# Altium PCB RRTC_PCB_V1-2.PcbDoc
Units mil, origin at the board's own origin, x right, y up, seen from the top; angles counter-clockwise.
Board outline 6300 x 7800 mil, 4 copper layers (Top Layer, Int1, Int2, Bottom Layer), stack 53.912 mil thick; 67 components, 92 nets, 426 pads, 0 vias.
Unrouted connection lines stored in the file: 133.
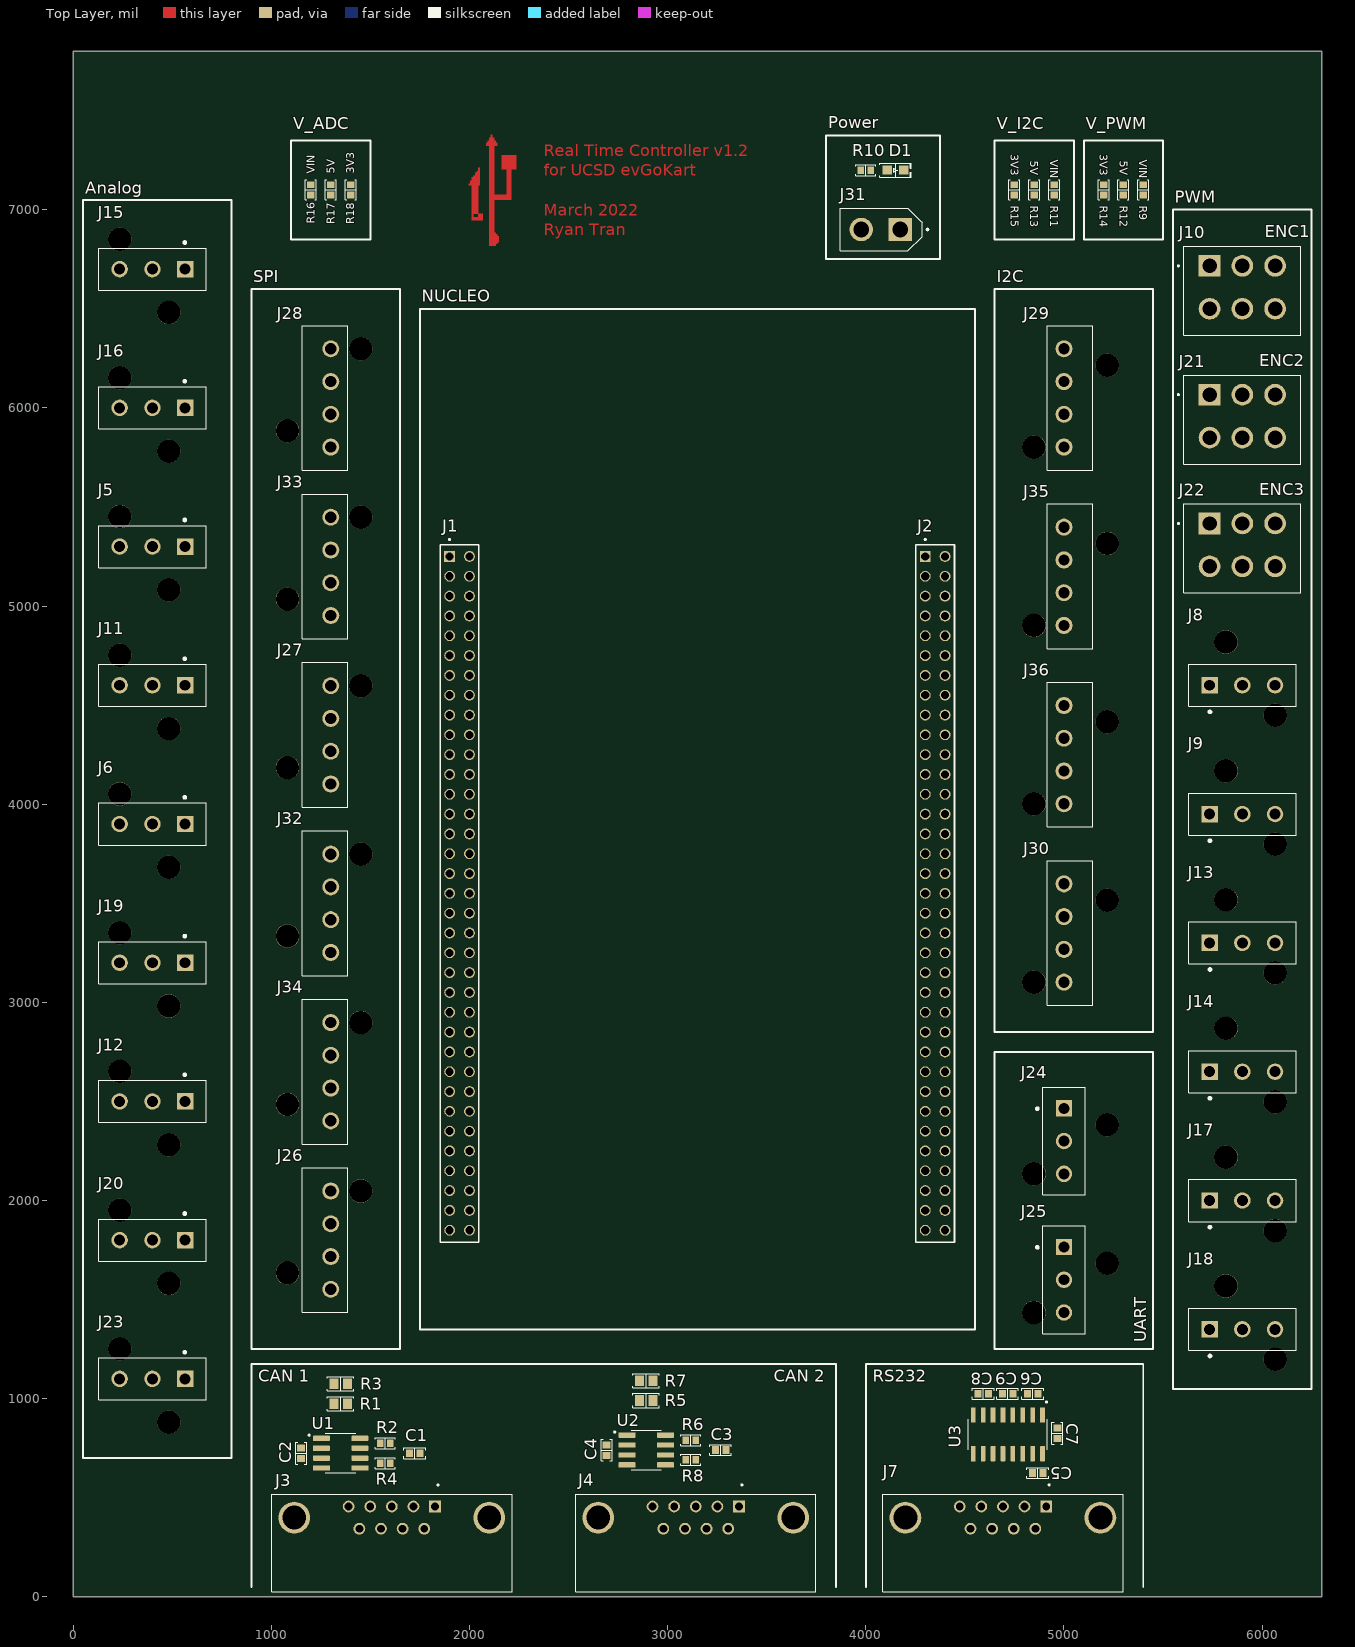
[diagram p0: Top Layer view]
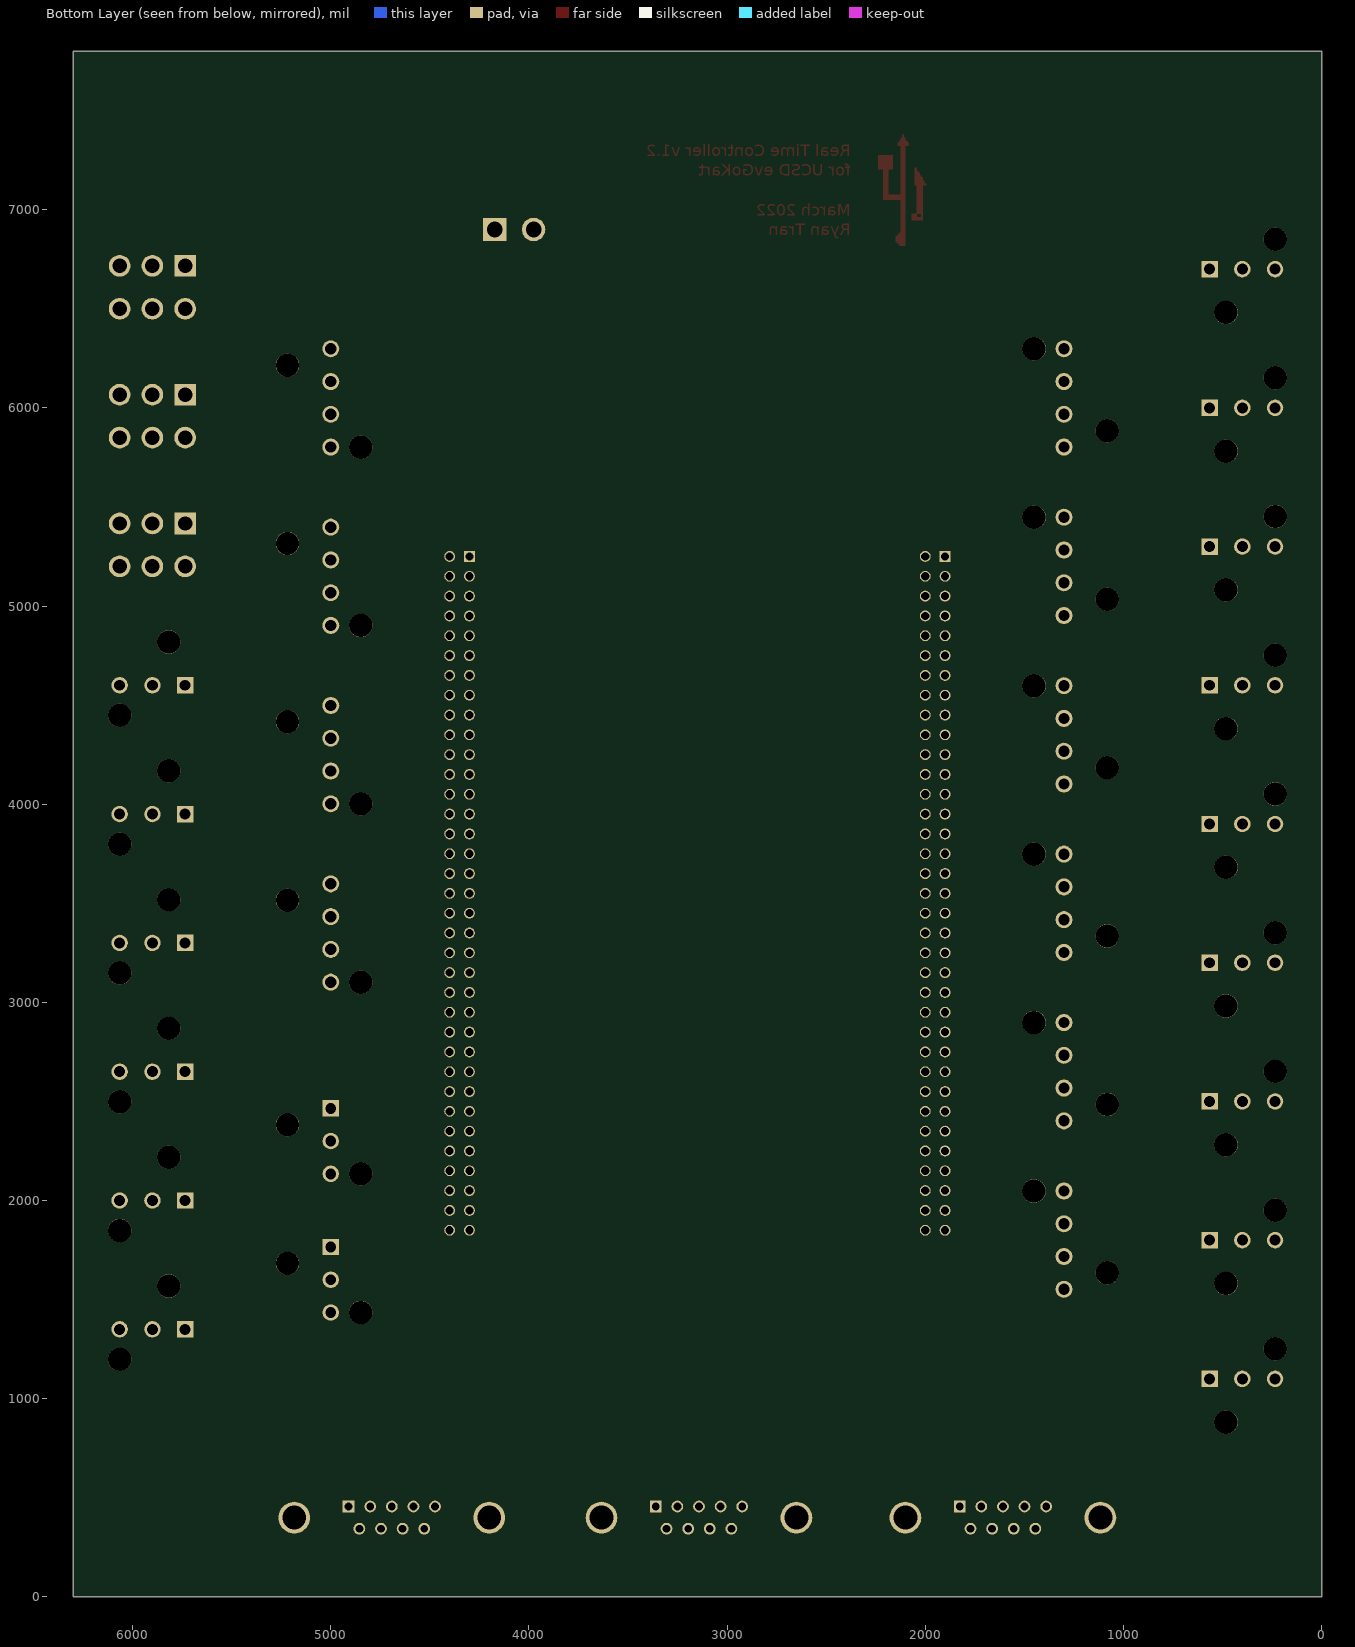
[diagram p1: Bottom Layer view, seen from below]
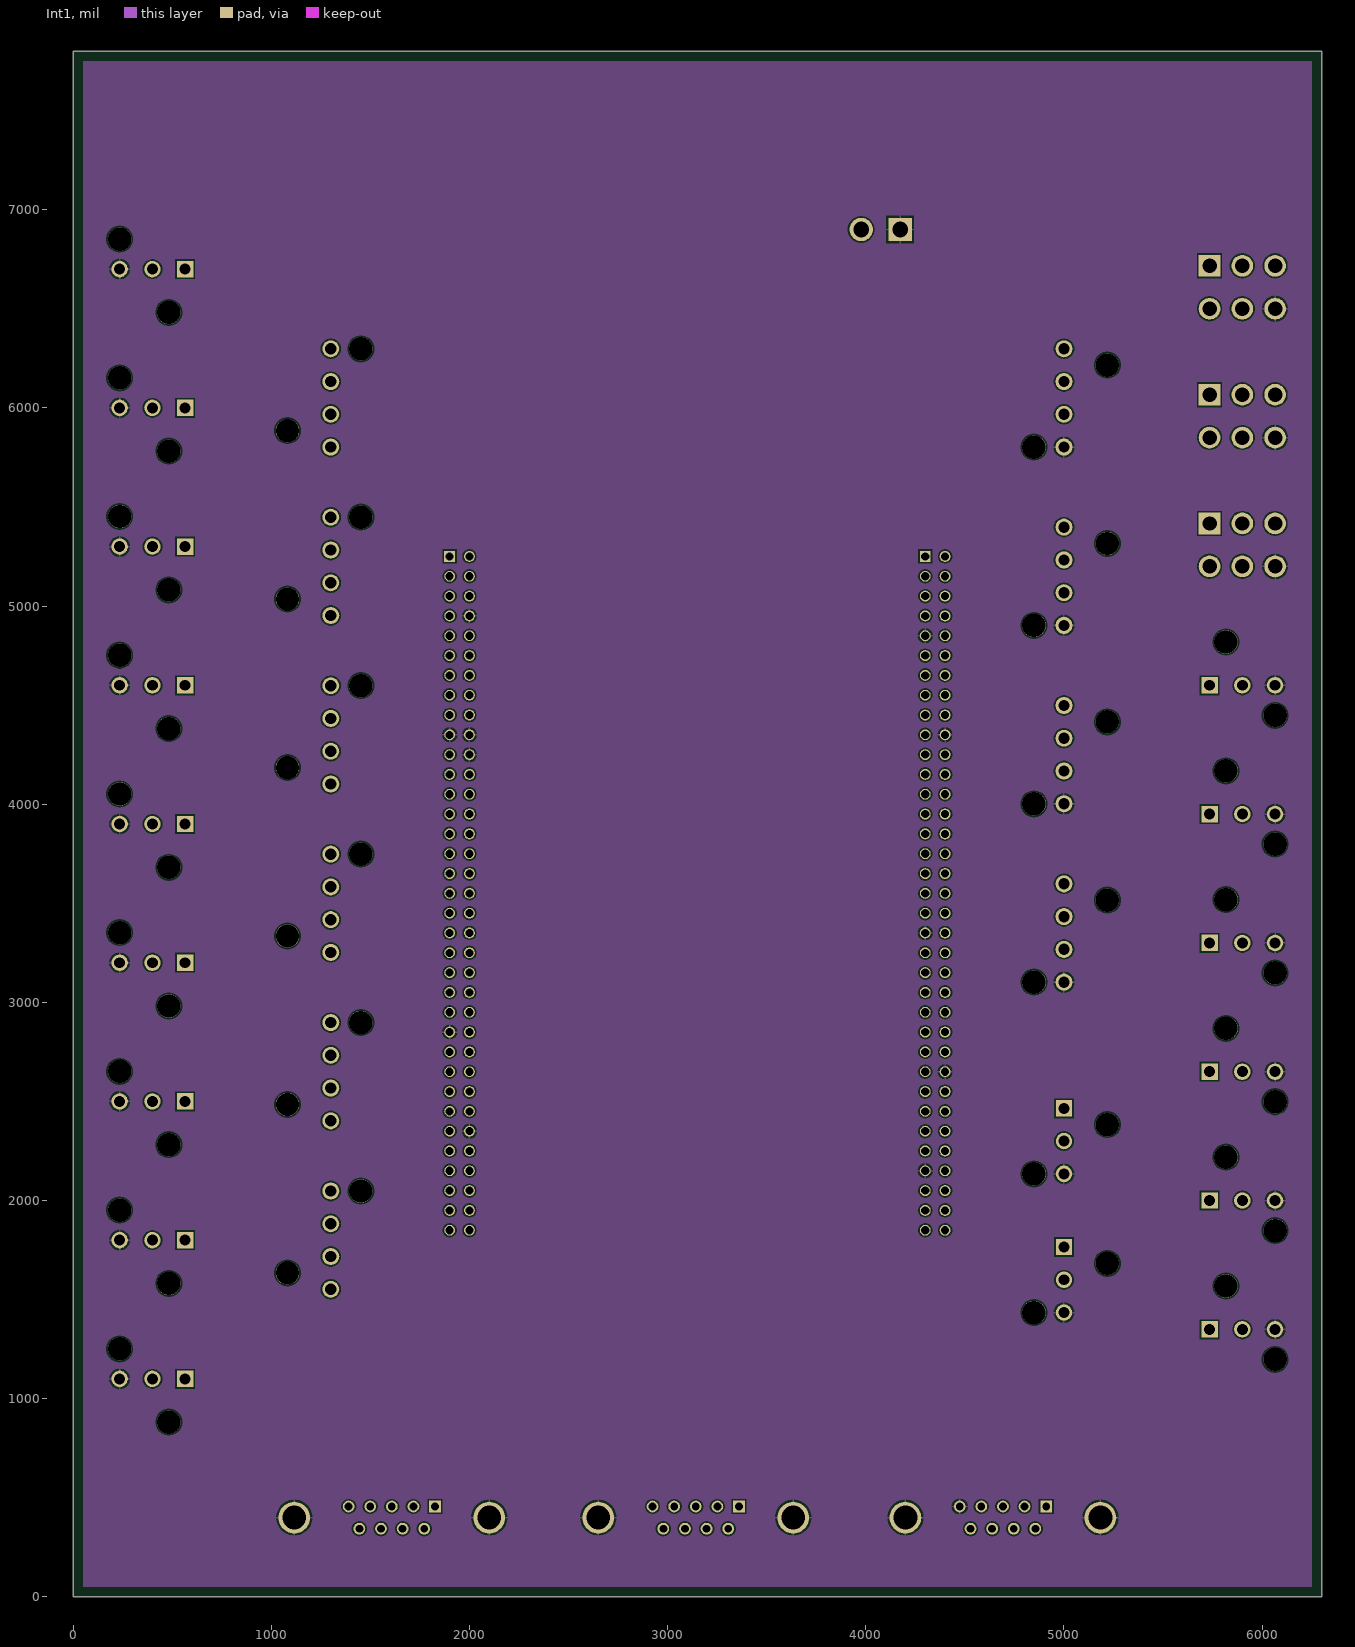
[diagram p2: Int1]
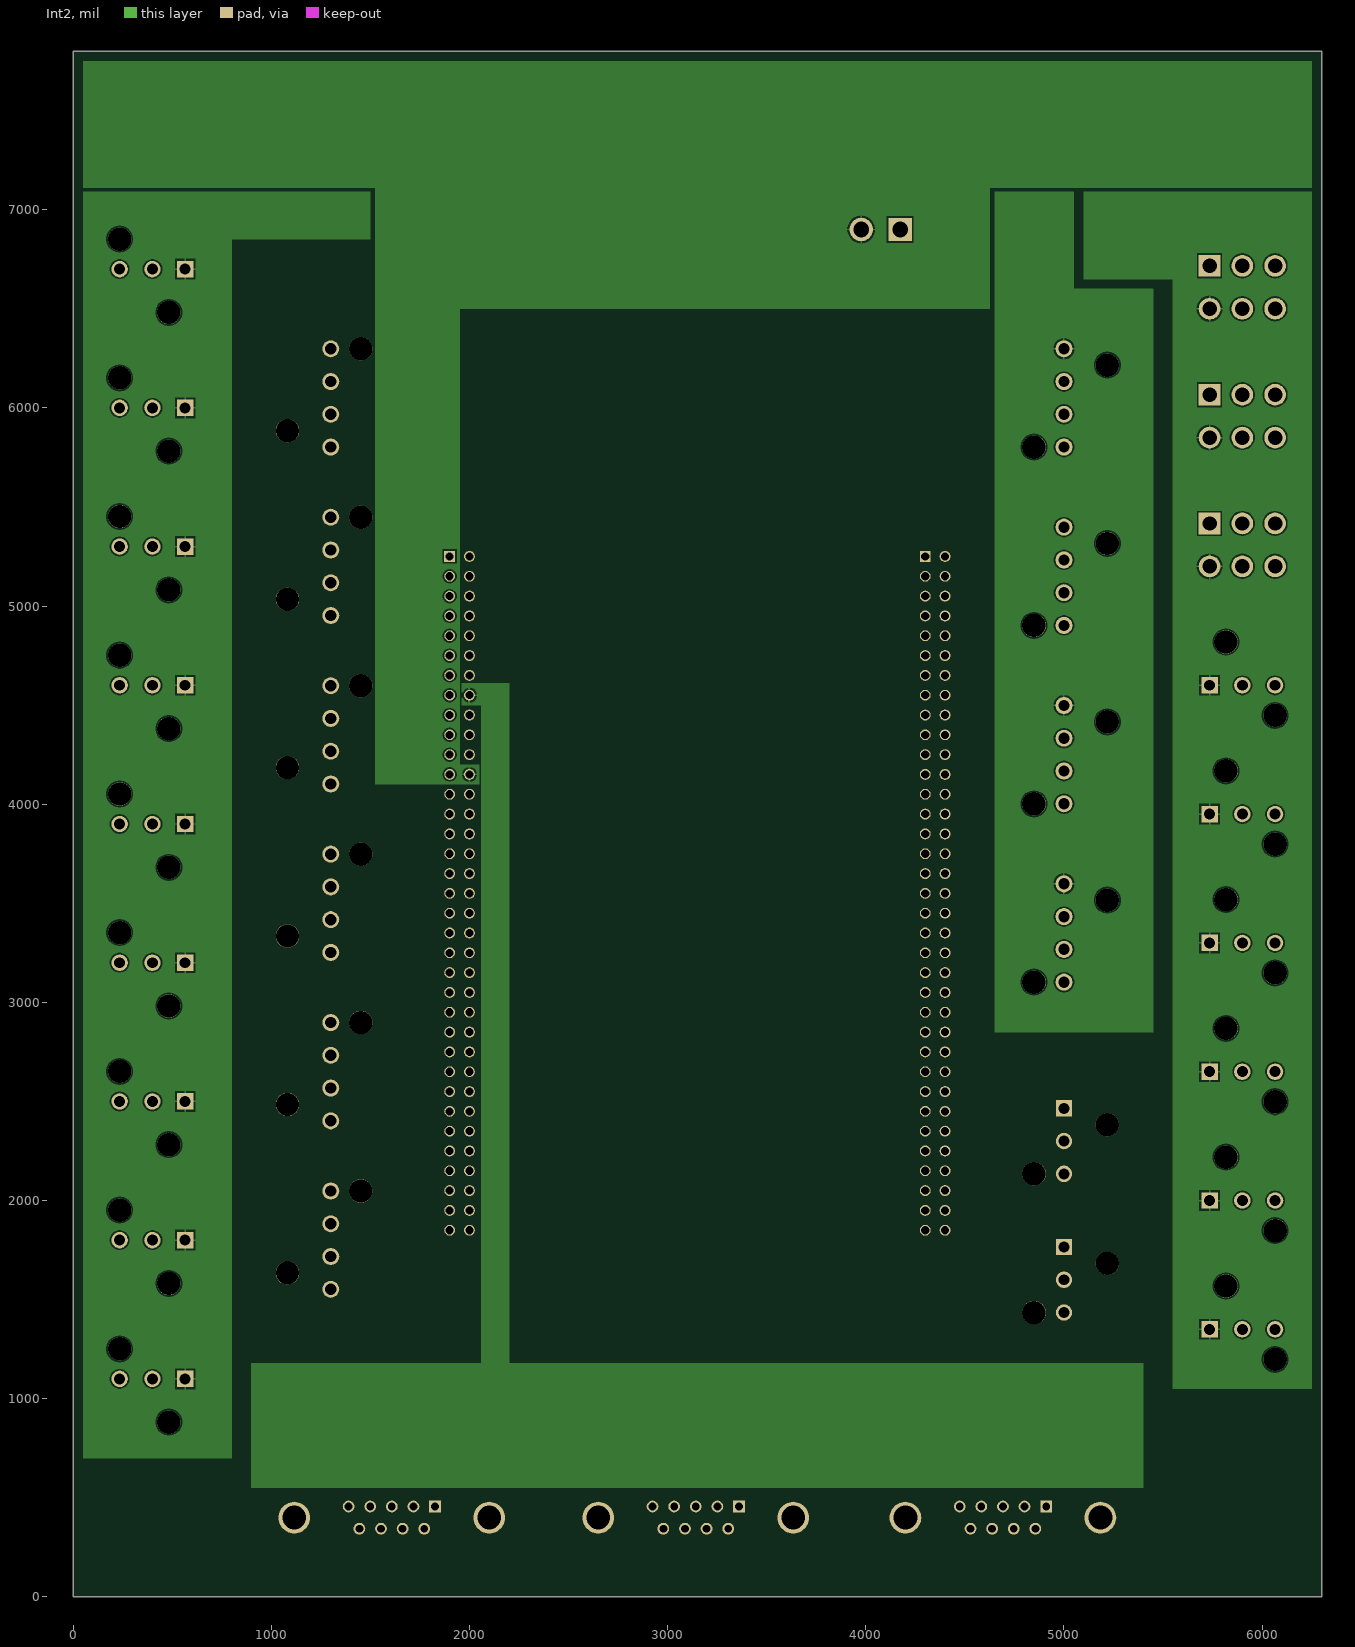
[diagram p3: Int2]

## Layer stack, top to bottom
Top Solder: solder mask 1, SM-001, Dk 4
Top Layer: signal copper 1.378
Dielectric 1: prepreg 5.1, PP-017, Dk 4.3
Dielectric 2: prepreg 5.1, PP-017, Dk 4.3
Int1: signal copper 1.378
Dielectric 3: core 28, Core-039, Dk 4.8
Int2: signal copper 1.378
Dielectric 4: prepreg 5.1, PP-017, Dk 4.3
Dielectric 5: prepreg 5.1, PP-017, Dk 4.3
Bottom Layer: signal copper 1.378
Bottom Solder: solder mask 1, SM-001, Dk 4

## Board outline
0,0 0,7800 6300,7800 6300,0

## Design rules (kind name [scope] priority, off if disabled: settings)
Clearance [All] p1: gap=7.87 ignorepadtopadclearanceinfootprint=FALSE except(5: Arc-Arc Arc-Track Track-Track SMDPad-SMDPad; 5.91: Arc-Text Track-Text SMDPad-Text THPad-Text Via-Text Fill-Text Poly-Text Region-Text Text-Text; 10: Arc-Via Arc-Hole Track-Via Track-Hole Via-Via; 12.99: Arc-THPad Track-THPad; 19.68: THPad-THPad)
DiffPairsRouting DiffPair_DIFF120DiffPairsRouting [InDifferentialPairClass('DIFF120')] p1: maxlimit=5 minlimit=5 mostfreqgap=5 toplayer_minwidth=5 toplayer_maxwidth=5 toplayer_prefwidth=5 midlayer1_minwidth=5 midlayer1_maxwidth=5 midlayer1_prefwidth=5 midlayer2_minwidth=5 midlayer2_maxwidth=5 midlayer2_prefwidth=5 bottomlayer_minwidth=5 bottomlayer_maxwidth=5 bottomlayer_prefwidth=5 maxuncoupledlength=500
DiffPairsRouting [All] p2: maxlimit=10 minlimit=5 mostfreqgap=10 toplayer_minwidth=5 toplayer_maxwidth=15 toplayer_prefwidth=15 midlayer1_minwidth=5 midlayer1_maxwidth=15 midlayer1_prefwidth=15 midlayer2_minwidth=5 midlayer2_maxwidth=15 midlayer2_prefwidth=15 bottomlayer_minwidth=5 bottomlayer_maxwidth=15 bottomlayer_prefwidth=15 maxuncoupledlength=500
HoleToHoleClearance [All] p1: gap=19.68 allowstackedmicrovias=TRUE
MatchedLengths DiffPair_DIFF120MatchedLengths [InDifferentialPairClass('DIFF120')] p1: tolerance=1000 checknetsindiffpair=FALSE checkdiffpairvsdiffpair=TRUE checkxsignals=TRUE checkothers=TRUE
PolygonConnect [All] p1: connectstyle=Relief reliefconductorwidth=10 reliefentries=4 polygonreliefangle="90 Angle" airgapwidth=10
RoutingVias [All] p1: holewidth=11.81 width=23.62 viastyle="Through Hole" minholewidth=11.81 minwidth=23.62 maxholewidth=248.03 maxwidth=248.03
SilkToSolderMaskClearance [IsPad] p1: minsilkscreentomaskgap=5.91 clearancetoexposedcopper=TRUE
SolderMaskExpansion [All] p1: expansion=4 istentingtop=FALSE
Width [All] p1: maxlimit=20 minlimit=5 preferedwidth=10
27 further rules are at their usual default settings.

## Classes and differential pairs
differential pair CAN2: +CAN2_P -CAN2_N
differential pair CAN1: +CAN1_P -CAN1_N

## Components (designator, comment, footprint, x,y, rotation, side; value= is the part's Value field where it differs from the comment)
C1 "4700pF" "CAP 0603_1608" 1723.43,725 r0 top
C2 "0.1µF" "CAP 0603_1608" 1150,725 r270 top
C3 "4700pF" "CAP 0603_1608" 3266.93,740.91 r0 top
C4 "0.1µF" "CAP 0603_1608" 2691.93,740.91 r270 top
C5 "0.1µF" "CAP 0603_1608" 4866.93,625 r0 top
C6 "0.1µF" "CAP 0603_1608" 4841.93,1025 r0 top
C7 "0.1µF" "CAP 0603_1608" 4966.93,825 r90 top
C8 "0.1µF" "CAP 0603_1608" 4591.93,1025 r0 top
C9 "0.1µF" "CAP 0603_1608" 4715.36,1025 r0 top
D1 "Green" "LED 0805_2012 GREEN" 4150,7200 r0 top
J1 "SSW-135-01-T-D" SAMTEC_SSW-135-01-T-D 1900,5250 r90 top locked
J2 "SSW-135-01-T-D" SAMTEC_SSW-135-01-T-D 4300,5250 r90 top locked
J3 "A-DF_09_A/KG-T2S" ASSMANN_A-DF09A/KG-T2S 1608.07,400 r0 top
J4 "A-DF_09_A/KG-T2S" ASSMANN_A-DF09A/KG-T2S 3141.93,400 r0 top
J5 "39-30-1039" MOLEX_39-30-1039 400,5300 r0 top
J6 "39-30-1039" MOLEX_39-30-1039 400,3900 r0 top
J7 "A-DF_09_A/KG-T2S" ASSMANN_A-DF09A/KG-T2S 4691.93,400 r0 top
J8 "39-30-1039" MOLEX_39-30-1039 5900,4600 r180 top
J9 "39-30-1039" MOLEX_39-30-1039 5900,3950 r180 top
J10 "0039281063" MOLEX_0039281063 5734.65,6716.54 r180 top
J11 "39-30-1039" MOLEX_39-30-1039 400,4600 r0 top
J12 "39-30-1039" MOLEX_39-30-1039 400,2500 r0 top
J13 "39-30-1039" MOLEX_39-30-1039 5900,3300 r180 top
J14 "39-30-1039" MOLEX_39-30-1039 5900,2650 r180 top
J15 "39-30-1039" MOLEX_39-30-1039 400,6700 r0 top
J16 "39-30-1039" MOLEX_39-30-1039 400,6000 r0 top
J17 "39-30-1039" MOLEX_39-30-1039 5900,2000 r180 top
J18 "39-30-1039" MOLEX_39-30-1039 5900,1350 r180 top
J19 "39-30-1039" MOLEX_39-30-1039 400,3200 r0 top
J20 "39-30-1039" MOLEX_39-30-1039 400,1800 r0 top
J21 "0039281063" MOLEX_0039281063 5734.65,6066.54 r180 top
J22 "0039281063" MOLEX_0039281063 5734.65,5416.54 r180 top
J23 "39-30-1039" MOLEX_39-30-1039 400,1100 r0 top
J24 "39-30-1039" MOLEX_39-30-1039 5000,2300 r90 top
J25 "39-30-1039" MOLEX_39-30-1039 5000,1600 r90 top
J26 "0039301049" MOLEX_0039301049 1300,1800 r270 top
J27 "0039301049" MOLEX_0039301049 1300,4350 r270 top
J28 "0039301049" MOLEX_0039301049 1300,6050 r270 top
J29 "0039301049" MOLEX_0039301049 5000,6050 r90 top
J30 "0039301049" MOLEX_0039301049 5000,3350 r90 top
J31 "XT30UPB-M" AMASS_XT30-M 4075,6900 r180 top
J32 "0039301049" MOLEX_0039301049 1300,3500 r270 top
J33 "0039301049" MOLEX_0039301049 1300,5200 r270 top
J34 "0039301049" MOLEX_0039301049 1300,2650 r270 top
J35 "0039301049" MOLEX_0039301049 5000,5150 r90 top
J36 "0039301049" MOLEX_0039301049 5000,4250 r90 top
R1 "1 kOhms" "RES 0805_2012" 1350,975 r180 top
R2 "60.4 Ohms" "RES 0603_1608" 1575,775 r0 top
R3 "1 kOhms" "RES 0805_2012" 1350,1075 r0 top
R4 "60.4 Ohms" "RES 0603_1608" 1575,675 r180 top
R5 "1 kOhms" "RES 0805_2012" 2891.93,990.91 r180 top
R6 "60.4 Ohms" "RES 0603_1608" 3116.93,790.91 r0 top
R7 "1 kOhms" "RES 0805_2012" 2891.93,1090.91 r0 top
R8 "60.4 Ohms" "RES 0603_1608" 3116.93,690.91 r180 top
R9 "=Value" "RES 0603_1608" 5400,7100 r270 top
R10 "1.2 kOhms" "RES 0603_1608" 4000,7200 r0 top
R11 "=Value" "RES 0603_1608" 4950,7100 r270 top
R12 "=Value" "RES 0603_1608" 5300,7100 r270 top
R13 "=Value" "RES 0603_1608" 4850,7100 r270 top
R14 "=Value" "RES 0603_1608" 5200,7100 r270 top
R15 "=Value" "RES 0603_1608" 4750,7100 r270 top
R16 "=Value" "RES 0603_1608" 1200,7100 r270 top
R17 "=Value" "RES 0603_1608" 1300,7100 r270 top
R18 "=Value" "RES 0603_1608" 1400,7100 r270 top
U1 "SN65HVD230DR" SOIC127P599X175-8N 1350,725 r0 top
U2 "SN65HVD230DR" SOIC127P599X175-8N 2891.93,740.91 r0 top
U3 "MAX3232IDR" SOIC127P600X175-16N 4716.93,820 r270 top

## Footprints (in the part's own frame and the unit in brackets; to place one, negate y for a bottom-side part, rotate by r counter-clockwise, add the part's x,y. Pads: shape width x height; smd on the part's side, far side on the other; paste and mask are expansions set on the pad)
AMASS_XT30-M [mm]
  rect 3x3 hole 2: 1(-2.5,0)
  round 3 hole 2: 2(2.5,0)
  silkscreen extent -6.1,-2.7 5.2,2.7
ASSMANN_A-DF09A/KG-T2S [mm]
  rect 1.508x1.508 hole 1: 1(5.54,1.42)
  round 1.508 hole 1: 2(2.77,1.42) 3(0,1.42) 4(-2.77,1.42) 5(-5.54,1.42) 6(4.155,-1.42) 7(1.385,-1.42) 8(-1.385,-1.42) 9(-4.155,-1.42)
  round 4.066 hole 3.05: S1(-12.495,0) S2(12.495,0)
  silkscreen extent -15.4,-9.5 15.41,4.3, body extent -15.41,-15.32 15.41,2.98, height 12.55
"CAP 0603_1608" [mm] "Chip Capacitor, 2-Leads, Body 1.60x0.80mm, IPC Medium Density"
  rect 0.9x1 smd: 1(-0.675,0) 2(0.675,0)
  silkscreen extent -1.4,-0.7 1.4,0.7, body extent -0.8,-0.41 0.8,0.41, height 0.82
"LED 0805_2012 GREEN" [mm] "Chip Diode, 2-Leads, Body 2.00x1.25mm, IPC Medium Density"
  rect 1.2x1.2 smd: 1(-1.05,0) 2(1.05,0)
  silkscreen extent -2.03,-0.9 2.03,0.9, body extent -1,-0.62 1,0.63, height 0.9
MOLEX_39-30-1039 [mm]
  rect 2.1x2.1 hole 1.4: 1(4.2,0)
  round 2.1 hole 1.4: 2(0,0) 3(-4.2,0)
  round 3 hole 3 unplated: ""(-4.2,3.85) ""(2.1,-5.55)
  silkscreen extent -6.9,-2.7 6.9,3.56, body extent -6.9,-6.63 6.9,4.93, height 12.45
MOLEX_0039281063 [mm]
  rect 2.775x2.775 hole 1.85: 1(0,0)
  round 2.775 hole 1.85: 2(-4.2,0) 3(-8.4,0) 4(0,5.5) 5(-4.2,5.5) 6(-8.4,5.5)
  silkscreen extent -11.7,-2.5 4.1,8.9, body extent -11.5,-2.3 3.1,8.7, height 12.8
MOLEX_0039301049 [mm]
  round 2.175 hole 1.45: 1(6.3,0) 2(2.1,0) 3(-2.1,0) 4(-6.3,0)
  round 3 hole 3 unplated: ""(-6.3,3.85) ""(4.2,-5.55)
  silkscreen extent -9.27,-3.68 9.27,2.16, body extent -9,-6.62 9,4.94, height 12.8
"RES 0603_1608" [mm] "Chip Resistor, 2-Leads, Body 1.60x0.80mm, IPC Medium Density"
  rect 0.85x0.95 smd: 1(-0.65,0) 2(0.65,0)
  silkscreen extent -1.27,-0.7 1.27,0.7, body extent -0.8,-0.4 0.8,0.4, height 0.45
"RES 0805_2012" [mm] "Chip Resistor, 2-Leads, Body 2.00x1.25mm, IPC Medium Density"
  rect 1.15x1.35 smd: 1(-0.875,0) 2(0.875,0)
  silkscreen extent -1.7,-0.9 1.7,0.9, body extent -1,-0.62 1,0.63, height 0.6
SAMTEC_SSW-135-01-T-D [mm]
  rect 1.39x1.39 hole 1.04: 01(0,0)
  round 1.39 hole 1.04: 02(0,-2.54) 03(-2.54,0) 04(-2.54,-2.54) 05(-5.08,0) 06(-5.08,-2.54) 07(-7.62,0) 08(-7.62,-2.54) 09(-10.16,0) 10(-10.16,-2.54) 11(-12.7,0) 12(-12.7,-2.54) 13(-15.24,0) 14(-15.24,-2.54) 15(-17.78,0) 16(-17.78,-2.54) 17(-20.32,0) 18(-20.32,-2.54) 19(-22.86,0) 20(-22.86,-2.54) 21(-25.4,0) 22(-25.4,-2.54) 23(-27.94,0) 24(-27.94,-2.54) 25(-30.48,0) 26(-30.48,-2.54) 27(-33.02,0) 28(-33.02,-2.54) 29(-35.56,0) 30(-35.56,-2.54) 31(-38.1,0) 32(-38.1,-2.54) 33(-40.64,0) 34(-40.64,-2.54) 35(-43.18,0) 36(-43.18,-2.54) 37(-45.72,0) 38(-45.72,-2.54) 39(-48.26,0) 40(-48.26,-2.54) 41(-50.8,0) 42(-50.8,-2.54) 43(-53.34,0) 44(-53.34,-2.54) 45(-55.88,0) 46(-55.88,-2.54) 47(-58.42,0) 48(-58.42,-2.54) 49(-60.96,0) 50(-60.96,-2.54) 51(-63.5,0) 52(-63.5,-2.54) 53(-66.04,0) 54(-66.04,-2.54) 55(-68.58,0) 56(-68.58,-2.54) 57(-71.12,0) 58(-71.12,-2.54) 59(-73.66,0) 60(-73.66,-2.54) 61(-76.2,0) 62(-76.2,-2.54) 63(-78.74,0) 64(-78.74,-2.54) 65(-81.28,0) 66(-81.28,-2.54) 67(-83.82,0) 68(-83.82,-2.54) 69(-86.36,0) 70(-86.36,-2.54)
  silkscreen extent -87.89,-3.75 2.27,1.21, body extent -87.88,-3.75 1.52,1.21, height 8.51
SOIC127P599X175-8N [mil]
  rrect25% 85x27 smd: 1(-97.24,75) 2(-97.24,25) 3(-97.24,-25) 4(-97.24,-75) 5(97.24,-75) 6(97.24,-25) 7(97.24,25) 8(97.24,75)
  silkscreen extent -163,-99 77,99, body extent -118,-96 118,96, height 69
SOIC127P600X175-16N [mm]
  rrect25% 1.97x0.6 smd: 1(-2.475,4.445) 2(-2.475,3.175) 3(-2.475,1.905) 4(-2.475,0.635) 5(-2.475,-0.635) 6(-2.475,-1.905) 7(-2.475,-3.175) 8(-2.475,-4.445) 9(2.475,-4.445) 10(2.475,-3.175) 11(2.475,-1.905) 12(2.475,-0.635) 13(2.475,0.635) 14(2.475,1.905) 15(2.475,3.175) 16(2.475,4.445)
  silkscreen extent -4.24,-5.07 1.95,5.07, body extent -3,-4.95 3,4.95, height 1.75

## Part data
C1 C3: library part CGA3E2X7R1H472K080AA, "CAP CER 4700PF 50V X7R 0603", Device Package="0603 (1608 Metric)", Manufacturer="TDK Corporation", Operating Temperature="-55°C ~ 125°C", Ratings=AEC-Q200, Supplier Part Number 1=445-5661-1-ND, Temperature Coefficient=X7R, Tolerance=±10%, Voltage - Rated=50V, Applications=Automotive, Capacitance=4700pF, ComponentLink1Description=Datasheet, ComponentLink1URL=https://product.tdk.com/info/en/catalog/datasheets/mlcc_automotive_general_en.pdf?ref_disty=digikey, ComponentLink2Description="DigiKey Link", ComponentLink2URL=http://digikey.com/product-detail/en/tdk-corporation/CGA3E2X7R1H472K080AA/445-5661-1-ND/2443701, LastUpdated="9/2/2020 1:03:30 AM", Lifecycle Status=Active, Minimum Order=1, Mounting Type="Surface Mount, MLCC", Package / Case="0603 (1608 Metric)", Packaging=TapeAndReel, Part Number=CGA3E2X7R1H472K080AA, Part Status=Active, PartId=5842, Price=0.01, Series=CGA, Size / Dimension="0.063\" L x 0.031\" W (1.60mm x 0.80mm)", Supplier 1=DigiKey, Thickness (Max)="0.035\" (0.90mm)"
C2 C4 C5 C6 C7 C8 C9: library part CL10B104KA8NNNC, "CAP CER 0.1UF 25V X7R 0603", Device Package="0603 (1608 Metric)", Manufacturer="Samsung Electro-Mechanics", Operating Temperature="-55°C ~ 125°C", Supplier Part Number 1=1276-1006-1-ND, Temperature Coefficient=X7R, Tolerance=±10%, Voltage - Rated=25V, Applications="General Purpose", Capacitance=0.1µF, ComponentLink1Description=Datasheet, ComponentLink1URL=http://www.samsungsem.com/kr/support/product-search/mlcc/CL10B104KA8NNNC.jsp, ComponentLink2Description="DigiKey Link", ComponentLink2URL=http://digikey.com/product-detail/en/samsung-electro-mechanics/CL10B104KA8NNNC/1276-1006-1-ND/3889092, LastUpdated="9/2/2020 1:03:22 AM", Lifecycle Status=Active, Minimum Order=1, Mounting Type="Surface Mount, MLCC", Package / Case="0603 (1608 Metric)", Packaging=TapeAndReel, Part Number=CL10B104KA8NNNC, Part Status=Active, PartId=9793, Price=0.01, Series=CL, Size / Dimension="0.063\" L x 0.031\" W (1.60mm x 0.80mm)", Supplier 1=DigiKey, Thickness (Max)="0.035\" (0.90mm)"
D1: library part LTST-C170GKT, "LED GREEN CLEAR SMD", Current - Test=10mA, Device Package="0805 (2012 Metric)", Lens Color=Colorless, Manufacturer="Lite-On Inc.", Millicandela Rating=6mcd, Supplier Part Number 1=160-1179-1-ND, Voltage - Forward (Vf) (Typ)=2.1V, Color=Green, ComponentLink1Description=Datasheet, ComponentLink1URL=//media.digikey.com/pdf/Data%20Sheets/Lite-On%20PDFs/LTST-C170GKT.pdf, ComponentLink2Description="DigiKey Link", ComponentLink2URL=http://digikey.com/product-detail/en/lite-on-inc/LTST-C170GKT/160-1179-1-ND/269251, Configuration=Standard, Height (Max)=1.10mm, LastUpdated="9/2/2020 1:21:04 AM", Lens Size="1.40mm x 1.25mm", Lens Style="Rectangle with Flat Top", Lens Transparency=Clear, Lifecycle Status=Active, Minimum Order=1, Mounting Type="Surface Mount", Package / Case="0805 (2012 Metric)", Packaging=TapeAndReel, Part Number=LTST-C170GKT, Part Status=Active, PartId=282, Price=0.05, Series=-, Size / Dimension="2.00mm L x 1.25mm W", Supplier 1=DigiKey, Viewing Angle=130°, Wavelength - Dominant=569nm, Wavelength - Peak=565nm
J1 J2: Package=None, Availability=Unavailable, MF=Samtec, MP=SSW-135-01-T-D, Price=None
J3 J4 J7: "9 Position D-Sub Receptacle, Female Sockets Connector", Package=None, Availability=Unavailable, Check_prices=https://www.snapeda.com/parts/A-DF%2009%20A/KG-T2S/Assmann%20WSW%20Components/view-part/2761262/?ref=eda, MF="Assmann WSW", MP="A-DF 09 A/KG-T2S", Price=None, SnapEDA_Link=https://www.snapeda.com/parts/A-DF%2009%20A/KG-T2S/Assmann%20WSW%20Components/view-part/2761262/?ref=snap
J5 J6 J8 J9 J11 J12 J13 J14 J15 J16 J17 J18 J19 J20 J23 J24 J25: "Connector Header Through Hole 3 position 0.165 _4.20mm_", Package=None, Availability=Unavailable, MF=Molex, MP=39301039, Price=None, SnapEDA_Link=https://www.snapeda.com/parts/39301039/Molex/view-part/1160208/?ref=snap
J10 J21 J22: "Connector Header Through Hole, 6 position 0.165 (4.20mm)", Package=None, Availability=Unavailable, DigiKey-Purchase-URL=https://snapeda.com/shop?store=DigiKey&id=2597941, MF=Molex, MP=0026013115, Price=None, SnapEDA_Link=https://www.snapeda.com/parts/0026013115/Molex/view-part/2597941/?ref=snap
J26 J27 J28 J29 J30 J32 J33 J34 J35 J36: "Connector Header Through Hole 4 position 0.165 _4.20mm_", Package=None, Availability=Unavailable, MF=Molex, MP=0039301049, Price=None, SnapEDA_Link=https://www.snapeda.com/parts/0039301049/Molex/view-part/104320/?ref=snap
J31: "Plug; DC supply; XT60; male; PIN: 2; for cable; soldered; 30A; 500V", Package="Package Analog Devices", Availability=Unavailable, MF=AMASS, MP=XT60-M, Price=None, SnapEDA_Link=https://www.snapeda.com/parts/XT60-M/AMASS/view-part/2883912/?ref=snap
R1 R3 R5 R7: library part RNCP0805FTD1K00, "RES 1K OHM 1% 1/4W 0805", Device Package="0805 (2012 Metric)", Manufacturer="Stackpole Electronics Inc", Operating Temperature="-55°C ~ 155°C", Power (Watts)="0.25W, 1/4W", Supplier Device Package=0805, Supplier Part Number 1=RNCP0805FTD1K00CT-ND, Temperature Coefficient=±100ppm/°C, Tolerance=±1%, ComponentLink1Description=Datasheet, ComponentLink1URL=https://www.seielect.com/catalog/sei-rncp.pdf, ComponentLink2Description="DigiKey Link", ComponentLink2URL=http://digikey.com/product-detail/en/stackpole-electronics-inc/RNCP0805FTD1K00/RNCP0805FTD1K00CT-ND/2240568, Composition="Thin Film", Features="Anti-Sulfur, Moisture Resistant", Height - Seated (Max)="0.024\" (0.60mm)", LastUpdated="9/2/2020 1:15:23 AM", Lifecycle Status=Active, Minimum Order=1, Number of Terminations=2, Package / Case="0805 (2012 Metric)", Packaging=TapeAndReel, Part Number=RNCP0805FTD1K00, Part Status=Active, PartId=28023, Price=0.01, Resistance="1 kOhms", Series=RNCP, Size / Dimension="0.079\" L x 0.049\" W (2.00mm x 1.25mm)", Supplier 1=DigiKey
R2 R4 R6 R8: library part RMCF0603FT60R4, "RES 60.4 OHM 1% 1/10W 0603", Device Package="0603 (1608 Metric)", Manufacturer="Stackpole Electronics Inc", Operating Temperature="-55°C ~ 155°C", Power (Watts)="0.1W, 1/10W", Ratings=AEC-Q200, Supplier Device Package=0603, Supplier Part Number 1=RMCF0603FT60R4CT-ND, Temperature Coefficient=±100ppm/°C, Tolerance=±1%, ComponentLink1Description=Datasheet, ComponentLink1URL=https://www.seielect.com/catalog/sei-rmcf_rmcp.pdf, ComponentLink2Description="DigiKey Link", ComponentLink2URL=http://digikey.com/product-detail/en/stackpole-electronics-inc/RMCF0603FT60R4/RMCF0603FT60R4CT-ND/2418105, Composition="Thick Film", Features="Automotive AEC-Q200", Height - Seated (Max)="0.022\" (0.55mm)", LastUpdated="9/2/2020 1:10:13 AM", Lifecycle Status=Active, Minimum Order=1, Number of Terminations=2, Package / Case="0603 (1608 Metric)", Packaging=CutTape, Part Number=RMCF0603FT60R4, Part Status=Active, PartId=10803, Price=0.10, Resistance="60.4 Ohms", Series=RMCF, Size / Dimension="0.061\" L x 0.031\" W (1.55mm x 0.80mm)", Supplier 1=DigiKey
R9 R11 R12 R13 R14 R15 R16 R17 R18: library part CRCW06030000Z0EBC, "RES SMD 0 OHM JUMP 1/10W 0603", Device Package="0603 (1608 Metric)", Manufacturer="Vishay Dale", Operating Temperature="-55°C ~ 155°C", Power (Watts)="0.1W, 1/10W", Supplier Device Package=0603, Supplier Part Number 1=541-4013-1-ND, Tolerance=Jumper, ComponentLink1Description=Datasheet, ComponentLink1URL=http://www.vishay.com/docs/28773/crcwce3.pdf, ComponentLink2Description="DigiKey Link", ComponentLink2URL=http://digikey.com/product-detail/en/vishay-dale/CRCW06030000Z0EBC/541-4013-1-ND/7928696, Composition="Thick Film", Height - Seated (Max)="0.022\" (0.55mm)", LastUpdated="9/2/2020 1:10:22 AM", Lifecycle Status=Active, Minimum Order=1, Number of Terminations=2, Package / Case="0603 (1608 Metric)", Packaging=CutTape, Part Number=CRCW06030000Z0EBC, Part Status=Active, PartId=6257, Price=0.10, Series=CRCW-C, Supplier 1=DigiKey
R10: library part CRGCQ0603F1K2, "CRGCQ 0603 1K2 1%", Device Package="0603 (1608 Metric)", Manufacturer="TE Connectivity Passive Product", Operating Temperature="-55°C ~ 155°C", Power (Watts)="0.1W, 1/10W", Ratings=AEC-Q200, Supplier Device Package=0603, Supplier Part Number 1=A129689CT-ND, Temperature Coefficient=±100ppm/°C, Tolerance=±1%, ComponentLink1Description=Datasheet, ComponentLink1URL=https://www.te.com/commerce/DocumentDelivery/DDEController?Action=srchrtrv&DocNm=1773204-3&DocType=DS&DocLang=English, ComponentLink2Description="DigiKey Link", ComponentLink2URL=http://digikey.com/product-detail/en/te-connectivity-passive-product/CRGCQ0603F1K2/A129689CT-ND/8577521, Composition="Thick Film", Features="Automotive AEC-Q200, Moisture Resistant", Height - Seated (Max)="0.022\" (0.55mm)", LastUpdated="9/2/2020 1:09:39 AM", Lifecycle Status=Active, Minimum Order=1, Number of Terminations=2, Package / Case="0603 (1608 Metric)", Packaging=CutTape, Part Number=CRGCQ0603F1K2, Part Status=Active, PartId=23998, Price=0.10, Resistance="1.2 kOhms", Series=CRGCQ, Size / Dimension="0.063\" L x 0.031\" W (1.60mm x 0.80mm)", Supplier 1=DigiKey
U1 U2: "3.3 V CAN Transceiver with Standby Mode 8-SOIC -40 to 85", Package="SOIC-8 Texas Instruments", Arrow_Electronics-Purchase-URL=https://snapeda.com/shop?store=Arrow+Electronics&id=51767, Availability=Good, DigiKey-Purchase-URL=https://snapeda.com/shop?store=DigiKey&id=51767, MF="Texas Instruments", Mouser-Purchase-URL=https://snapeda.com/shop?store=Mouser&id=51767, MP=SN65HVD230DR, Price=None, SnapEDA_Link=https://www.snapeda.com/parts/SN65HVD230DR/Texas%20Instruments/view-part/51767/?ref=snap, Texas_Instruments-Purchase-URL=https://snapeda.com/shop?store=Texas+Instruments&id=51767
U3: "3-V to 5.5-V multichannel RS-232 line driver & receiver 16-SOIC -40 to 85", Package="SOIC-16 Texas Instruments", Check_prices=https://www.snapeda.com/parts/MAX3232IDR/Texas%20Instruments/view-part/559735/?ref=eda, Digi-Key_Part_Number=296-13098-1-ND, MF="Texas Instruments", MP=MAX3232IDR, Purchase-URL=https://pricing.snapeda.com/search/part/MAX3232IDR/?ref=eda, SnapEDA_Link=https://www.snapeda.com/parts/MAX3232IDR/Texas%20Instruments/view-part/559735/?ref=snap

## Nets (pads, with @x,y where several pads share a name; then routed paths per layer and width w, separated by ;. In a path a pad name is that pad's centre, name@x,y a point inside that pad or via, vN(x,y) a via of type N, cw(c..) or ccw(c..) an arc to the next point about the centre after c; other vN are vias at no path point)
3V3: C2.2 C4.2 C5.2 J1.16 R1.2 R5.2 R14.1 R15.1 R18.1 U1.3 U2.3 U3.16
5V: J1.18 R12.1 R13.1 R17.1
A0: J2.57 J5.2
A1: J2.59 J6.2
A2: J1.38 J11.2
A3: J2.37 J12.2
A4: J2.24 J15.2
A5: J2.36 J16.2
A6: J2.38 J19.2
A7: J2.42 J20.2
A8: J2.58 J23.2
CAN1_N: J3.2 R4.2 U1.6
CAN1_P: J3.7 R2.1 U1.7
CAN1_RX: J1.57 U1.4
CAN1_TX: J1.55 U1.1
CAN2_N: J4.2 R8.2 U2.6
CAN2_P: J4.7 R6.1 U2.7
CAN2_RX: J2.29 U2.4
CAN2_TX: J2.17 U2.1
ENC1A: J2.02 J10.1
ENC1B: J2.04 J10.2
ENC1C: J2.06 J10.3
ENC2A: J2.10 J21.1
ENC2B: J2.12 J21.2
ENC2C: J2.14 J21.3
ENC3A: J2.16 J22.1
ENC3B: J2.18 J22.2
ENC3C: J2.22 J22.3
GND: C1.2 C2.1 C3.2 C4.1 C5.1 C7.1 C8.1 D1.2 J1.08 J1.19 J1.20 J1.22 J1.49 J1.60 J2.09 J2.20 J2.39 J2.54 J2.63 J3.S1 J3.S2 J4.S1 J4.S2 J5.3 J6.3 J7.5 J7.S1 J7.S2 J8.3 J9.3 J10.6 J11.3 J12.3 J13.3 J14.3 J15.3 J16.3 J17.3 J18.3 J19.3 J20.3 J21.6 J22.6 J23.3 J24.3 J25.3 J29.4 J30.4 J31.1 J35.4 J36.4 R3.1 R7.1 U1.2 U2.2 U3.15
I2C1_SCL: J2.03 J29.2
I2C1_SDA: J2.05 J29.3
I2C2_SCL: J1.51 J30.2
I2C2_SDA: J1.53 J30.3
I2C3_SCL: J2.23 J35.2
I2C3_SDA: J2.01 J35.3
I2C4_SCL: J2.50 J36.2
I2C4_SDA: J2.60 J36.3
NetC1_1: C1.1 R2.2 R4.1 U1.5
NetC3_1: C3.1 R6.2 R8.1 U2.5
NetC6_1: C6.1 U3.3
NetC6_2: C6.2 U3.1
NetC7_2: C7.2 U3.2
NetC8_2: C8.2 U3.6
NetC9_1: C9.1 U3.5
NetC9_2: C9.2 U3.4
NetD1_1: D1.1 R10.2
NetJ7_2: J7.2 U3.14
NetJ7_3: J7.3 U3.13
NetR1_1: R1.1 R3.2 U1.8
NetR5_1: R5.1 R7.2 U2.8
PWM0: J2.11 J8.2
PWM1: J2.13 J9.2
PWM2: J2.19 J13.2
PWM3: J2.25 J14.2
PWM4: J2.41 J17.2
PWM5: J2.43 J18.2
PWM6: J2.51
PWM7: J2.55
SPI1_CS: J1.66 J26.4
SPI1_MISO: J1.63 J26.3
SPI1_MOSI: J1.45 J26.2
SPI1_SCK: J1.70 J26.1
SPI2_CS: J2.27 J27.4
SPI2_MISO: J1.35 J27.3
SPI2_MOSI: J1.37 J27.2
SPI2_SCK: J1.40 J27.1
SPI3_CS: J1.32 J28.4
SPI3_MISO: J1.02 J28.3
SPI3_MOSI: J1.43 J28.2
SPI3_SCK: J1.01 J28.1
SPI4_CS: J1.48 J32.4
SPI4_MISO: J1.50 J32.3
SPI4_MOSI: J1.62 J32.2
SPI4_SCK: J1.46 J32.1
SPI5_CS: J1.09 J33.4
SPI5_MISO: J1.54 J33.3
SPI5_MOSI: J1.56 J33.2
SPI5_SCK: J1.11 J33.1
SPI6_CS: J2.66 J34.4
SPI6_MISO: J1.65 J34.3
SPI6_MOSI: J2.61 J34.2
SPI6_SCK: J1.68 J34.1
UART5_RX: J1.04 U3.12
UART5_TX: J1.03 U3.11
UART7_RX: J2.44 J24.2
UART7_TX: J2.40 J24.1
UART8_RX: J2.64 J25.2
UART8_TX: J1.61 J25.1
VADC: J5.1 J6.1 J11.1 J12.1 J15.1 J16.1 J19.1 J20.1 J23.1 R16.2 R17.2 R18.2
VI2C: J29.1 J30.1 J36.1 R11.2 R13.2 R15.2
VIN: J1.24 J31.2 R9.1 R10.1 R11.1 R16.1
VPWM: J8.1 J9.1 J10.4 J13.1 J14.1 J17.1 J18.1 J21.4 J22.4 R9.2 R12.2 R14.2
pads on no net: J1.05 J1.06 J1.07 J1.10 J1.12 J1.13 J1.14 J1.15 J1.17 J1.21 J1.23 J1.25 J1.26 J1.27 J1.28 J1.29 J1.30 J1.31 J1.33 J1.34 J1.36 J1.39 J1.41 J1.42 J1.44 J1.47 J1.52 J1.58 J1.59 J1.64 J1.67 J1.69 J2.07 J2.08 J2.15 J2.21 J2.26 J2.28 J2.30 J2.31 J2.32 J2.33 J2.34 J2.35 J2.45 J2.46 J2.47 J2.48 J2.49 J2.52 J2.53 J2.56 J2.62 J2.65 J2.67 J2.68 J2.69 J2.70 J3.1 J3.3 J3.4 J3.5 J3.6 J3.8 J3.9 J4.1 J4.3 J4.4 J4.5 J4.6 J4.8 J4.9 J5. J6. J7.1 J7.4 J7.6 J7.7 J7.8 J7.9 J8. J9. J10.5 J11. J12. J13. J14. J15. J16. J17. J18. J19. J20. J21.5 J22.5 J23. J24. J25. J26. J27. J28. J29. J30. J32. J33. J34. J35. J35.1 J36. U3.7 U3.8 U3.9 U3.10

## Polygon pours and split planes (outlines as drawn)
VPWM on Int2 "VPWM_L03_P002" (solid, pour order 2): 5550,1050 6250,1050 6250,7090 5100,7090 5100,6650 5550,6650
VADC on Int2 "VADC_L03_P011" (solid, pour order 11): 50,7090 50,700 800,700 800,6850 1500,6850 1500,7090
3V3 on Int2 "3V3_L03_P015" (solid, pour order 15): 2200,4610 1960,4610 1960,4500 2060,4500 2060,1180 900,1180 900,550 5400,550 5400,1180 2200,1180
VI2C on Int2 "VI2C_L03_P012" (solid, pour order 12): 4650,7090 5050,7090 5050,6600 5450,6600 5450,2850 4650,2850
VIN on Int2 "VIN_L03_P013" (solid, pour order 13): 1950,4200 2050,4200 2050,4100 1525,4100 1525,7110 50,7110 50,7750 6250,7750 6250,7110 4625,7110 4625,6500 1950,6500
GND on Int1 "GND_L02_P010" (solid, pour order 10): 50,7750 50,50 6250,50 6250,7750

## Other copper
Top Layer:
  region: 2012,7147 2044,7147 2044,6963 2052,6963 2020,6963 2020,6979 2068,6979 2068,6971 2068,6963 2068,6955 2068,6947 2012,6947 2012,6955 2012,6963 2012,6971 2012,6979 2012,6987 2012,6995 2012,7003 2012,7011 2012,7019 2012,7027 2012,7035 2012,7043 2012,7051 2012,7059 2012,7067 2012,7075 2012,7083 2012,7091 2012,7099 2012,7107 2012,7115 2012,7123 1996,7123 1996,7131 2004,7131 2004,7139 2004,7147
  region: 2052,7203 2052,7195 2052,7187 2052,7179 2052,7171 2052,7163 2052,7155 2052,7147 2052,7139 2052,7131 2052,7123 2036,7123 2036,7179 2036,7171 2036,7155 2036,7147 2012,7147 2012,7155 2012,7163 2020,7163 2020,7171 2028,7171 2028,7179 2028,7187 2036,7187 2036,7195 2044,7195 2044,7203 2044,7211 2052,7211
  region: 2124,7051 2124,7043 2124,7035 2124,7027 2124,7019 2124,7011 2124,7003 2124,6995 2124,6987 2124,6979 2124,6971 2124,6963 2124,6955 2124,6947 2124,6939 2124,6931 2124,6923 2124,6915 2124,6907 2124,6899 2124,6891 2124,6883 2132,6883 2132,6875 2140,6875 2140,6867 2148,6867 2148,6859 2148,6851 2148,6843 2148,6835 2140,6835 2140,6827 2132,6827 2132,6819 2100,6819 2100,6827 2100,6835 2100,6843 2100,6851 2100,6859 2100,6867 2100,6875 2100,6883 2100,6891 2100,6899 2100,6907 2100,6915 2100,6923 2100,6931 2100,6939 2100,6947 2100,6955 2100,6963 2100,6971 2100,6979 2100,6987 2100,6995 2100,7003 2100,7011 2100,7019 2100,7027 2100,7035 2100,7043 2100,7051 2100,7059 2100,7067 2100,7075 2100,7083 2100,7091 2100,7099 2100,7107 2100,7115 2100,7123 2100,7131 2100,7139 2100,7147 2100,7155 2100,7163 2100,7171 2100,7179 2100,7187 2100,7195 2100,7203 2100,7211 2100,7219 2100,7227 2100,7235 2100,7243 2100,7251 2100,7259 2100,7267 2100,7275 2100,7283 2100,7291 2100,7299 2100,7307 2100,7363 2124,7363
  region: 2124,7315 2124,7307 2124,7299 2124,7291 2124,7283 2124,7275 2124,7267 2124,7259 2124,7251 2124,7243 2124,7235 2124,7227 2124,7219 2124,7211 2124,7203 2124,7195 2124,7187 2124,7179 2124,7171 2124,7163 2124,7155 2124,7147 2124,7139 2124,7131 2124,7123 2124,7115 2124,7107 2124,7099 2124,7091 2124,7083 2124,7075 2188,7075 2188,7059 2124,7059 2124,7075 2116,7075 2116,7083 2116,7091 2116,7099 2116,7107 2116,7115 2116,7123 2116,7131 2116,7139 2116,7147 2116,7155 2116,7163 2116,7171 2116,7179 2116,7187 2116,7195 2116,7203 2116,7211 2116,7219 2116,7227 2116,7235 2116,7243 2116,7251 2116,7259 2116,7267 2116,7275 2116,7283 2116,7291 2116,7299 2116,7307 2116,7315 2116,7323 2124,7323
  region: 2116,7371 2116,7363 2124,7363 2124,7355 2124,7347 2132,7347 2132,7339 2140,7339 2140,7331 2140,7323 2124,7323 2124,7331 2124,7339 2124,7347 2116,7347 2116,7355 2116,7363 2108,7363 2108,7371 2108,7379 2116,7379
  region: 2108,7355 2108,7347 2100,7347 2100,7355 2100,7363 2108,7363
  region: 2100,7339 2100,7323 2092,7323 2084,7323 2084,7331 2084,7339 2092,7339 2092,7347 2100,7347
  region: 2236,7267 2236,7259 2236,7251 2236,7243 2236,7235 2236,7227 2236,7219 2236,7211 2236,7203 2212,7203 2212,7211 2228,7211 2172,7211 2188,7211 2204,7211 2204,7059 2188,7059 2188,7083 2188,7091 2188,7099 2188,7107 2188,7115 2188,7123 2188,7131 2188,7139 2188,7147 2188,7155 2188,7163 2188,7171 2188,7179 2188,7187 2188,7195 2188,7203 2164,7203 2164,7211 2164,7219 2164,7227 2164,7235 2164,7243 2164,7251 2164,7259 2164,7267 2164,7275 2236,7275
  region: 2212,7195 2212,7187 2212,7179 2212,7171 2212,7163 2212,7155 2212,7147 2212,7139 2212,7131 2212,7123 2212,7115 2212,7107 2212,7099 2212,7091 2212,7083 2212,7075 2212,7067 2212,7059 2212,7051 2124,7051 2124,7059 2204,7059 2204,7067 2204,7075 2204,7083 2204,7091 2204,7099 2204,7107 2204,7115 2204,7123 2204,7131 2204,7139 2204,7147 2204,7155 2204,7163 2204,7171 2204,7179 2204,7187 2204,7195 2204,7211 2212,7211
  text "Real Time Controller v1.2 / for UCSD evGoKart /  / March 2022 / Ryan Tran" at 2375,6850 h100

## Silkscreen, mask and mechanical layers (free items; w line width, h text height)
Top Overlay:
  lines w10: 900,50 900,1175 3850,1175 3850,50 ; 4000,50 4000,1175 5400,1175 5400,50 ; 50,700 50,7050 800,7050 800,700 50,700 ; 900,1250 1650,1250 1650,6600 900,6600 900,1250 ; 1100,6850 1100,7350 1500,7350 1500,6850 1100,6850 ; 1750,1350 4550,1350 4550,6500 1750,6500 1750,1350 ; 3800,6750 3800,7375 4375,7375 4375,6750 3800,6750 ; 4650,1250 5450,1250 5450,2750 4650,2750 4650,1250 ; 4650,2850 4650,6600 5450,6600 5450,2850 4650,2850 ; 4650,6850 5050,6850 5050,7350 4650,7350 4650,6850 ; 5100,6850 5100,7350 5500,7350 5500,6850 5100,6850 ; 5550,1050 5550,7000 6250,7000 6250,1050 5550,1050
  text "Power" at 3810,7410 h60
  text "V_ADC" at 1110,7405 h60
  text "V_I2C" at 4660,7405 h60
  text "V_PWM" at 5110,7405 h60
  text "3V3" at 4731,7278.88 h40 r270
  text "3V3" at 5181,7278.88 h40 r270
  text "VIN" at 4931,7251.65 h40 r270
  text "VIN" at 5381,7251.65 h40 r270
  text "5V" at 4831,7247.08 h40 r270
  text "5V" at 5281,7247.08 h40 r270
  text "VIN" at 1219,7181 h40 r90
  text "5V" at 1319,7181 h40 r90
  text "3V3" at 1419,7181 h40 r90
  text "Analog" at 60,7080 h60
  text "PWM" at 5560,7035 h60
  text "ENC1" at 6012.32,6860 h60
  text "SPI" at 910,6635 h60
  text "I2C" at 4660,6635 h60
  text "NUCLEO" at 1760,6535 h60
  text "ENC2" at 5986.61,6210 h60
  text "ENC3" at 5986.61,5560 h60
  text "UART" at 5415,1285 h60 r90
  text "CAN 1" at 935,1085 h60
  text "CAN 2" at 3535,1085 h60
  text "RS232" at 4035,1085 h60
Top Solder:
  drawing of 9 lines, arcs and shapes, not listed
  text "Real Time Controller v1.2 / for UCSD evGoKart /  / March 2022 / Ryan Tran" at 2375,6850 h100
Mechanical 1:
  the board outline again, w47.24